# EAGLE board HUM-ASM-001-recover (EAGLE 9.5.1)
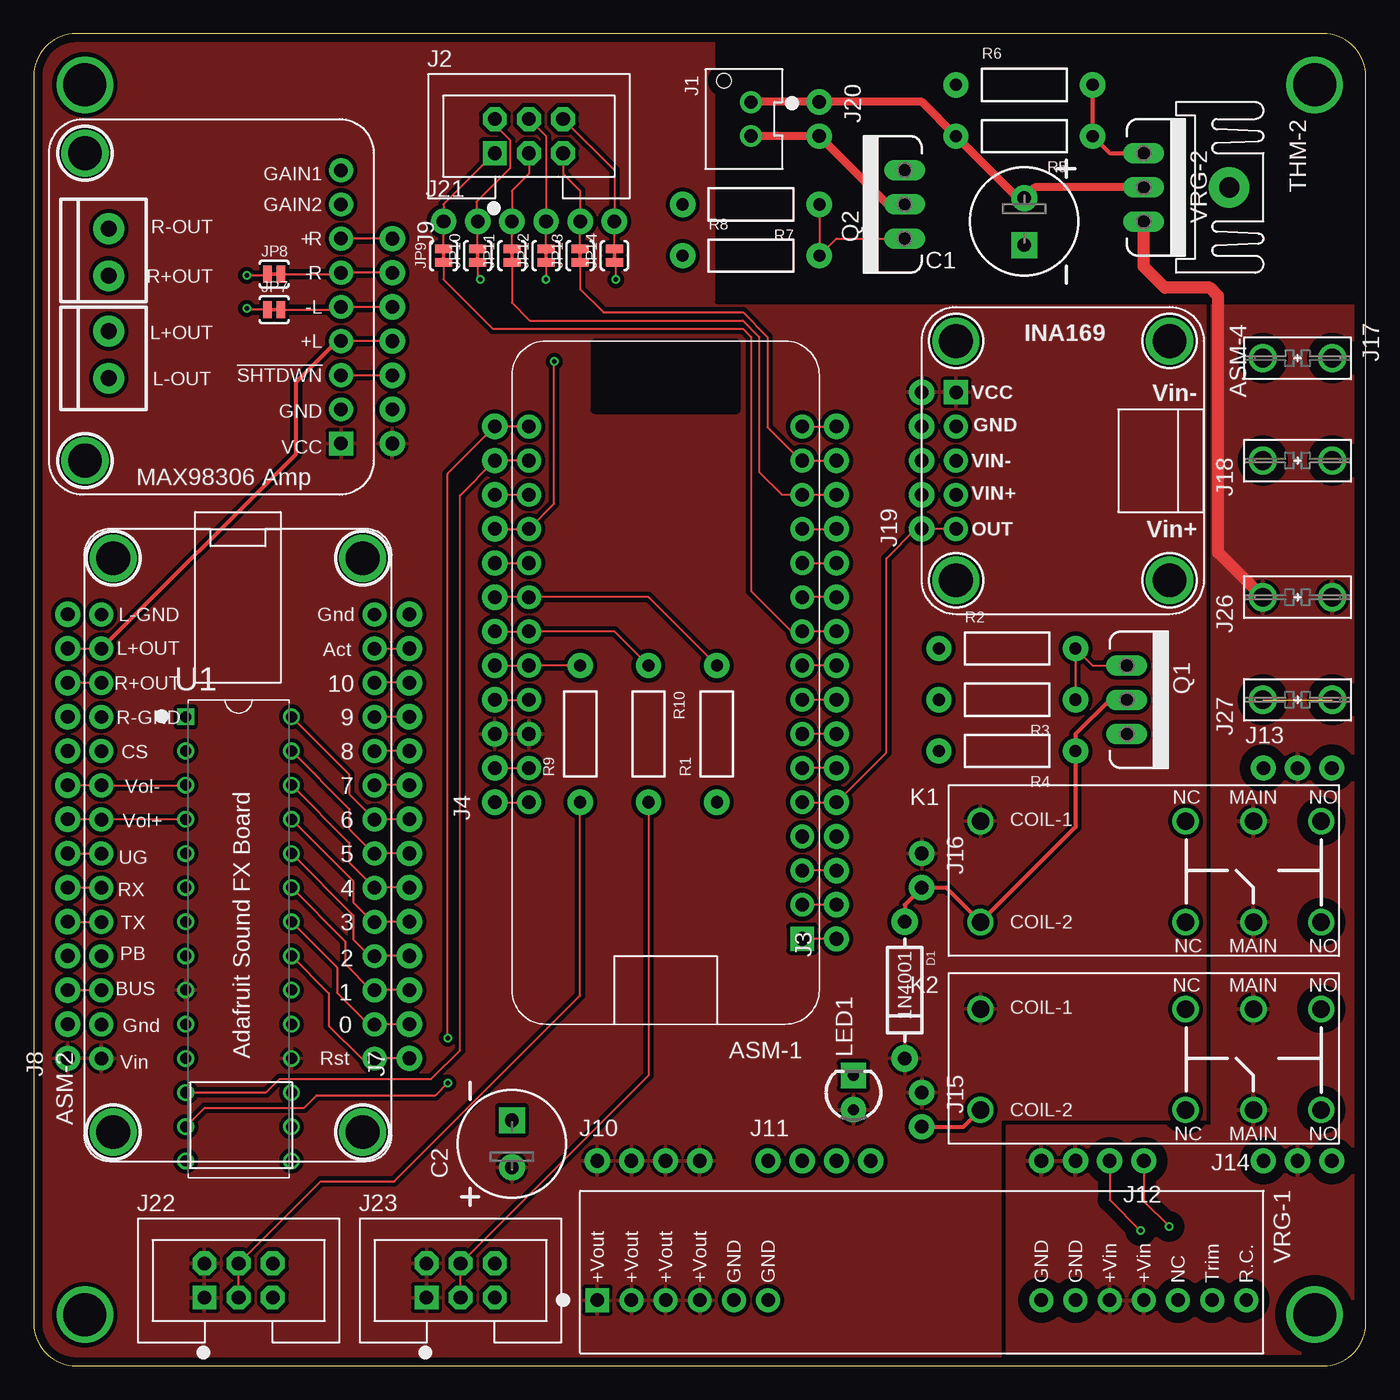
[diagram p0: board, top side]
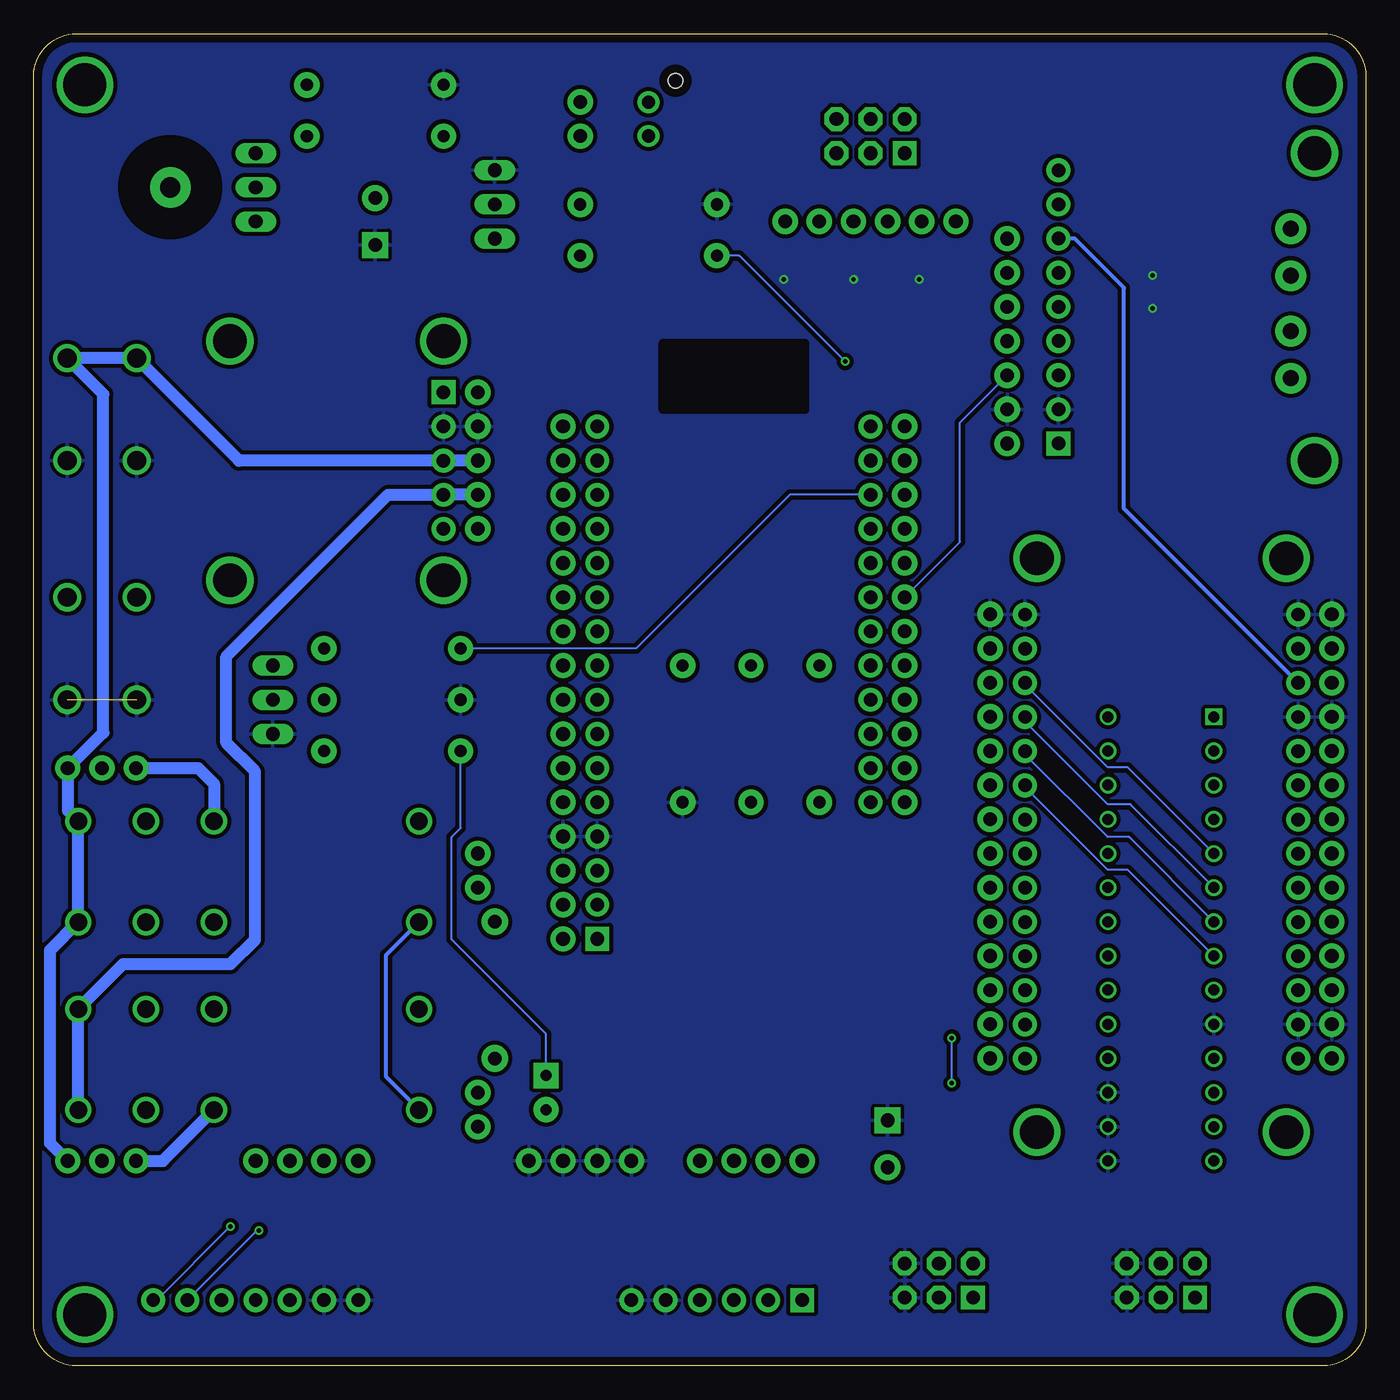
[diagram p1: board, bottom side, seen from below]

Size 99.06 x 99.06 mm. Coordinates in mm from the lower left corner, seen from the top.
Outline: 0,95.89 0,3.17 arc90 3.17,0 95.89,0 arc90 99.06,3.17 99.06,95.89 arc90 95.89,99.06 3.17,99.06 arc90 0,95.89
Copper layers (1*16): Top 0.035mm / dielectric 1.5mm / Bottom 0.035mm
Design rules "SeeedStudio_2layer_DRU_2017-06-08_MG": minimum track width 6mil, minimum drill 12mil, track to track 6mil, track to pad 6mil, pad to pad 6mil, via to via 6mil, smd to smd 0mil, copper to edge 25mil, drill to drill 10mil, minimum pad ring 6mil, minimum via ring 6mil, stop-mask expansion 2mil, vias tented up to drill 15mil, thermal gap 10mil

## Footprints (pad centres in the part's own frame; a part is rotated, then mirrored left to right if it is on the bottom)
ASM_ADAFRUIT_FEATHER_BLUEFRUIT = drill 1.016 pad 1.778: 3V3 -10.16,17.78; A0 -10.16,10.16; A1 -10.16,7.62; A2 -10.16,5.08; A3 -10.16,2.54; A4 -10.16,0; A5 -10.16,-2.54; AREF -10.16,15.24; D5 10.16,-12.7; D6 10.16,-10.16; D9 10.16,-7.62; D10 10.16,-5.08; D11 10.16,-2.54; D12 10.16,0; D13 10.16,2.54; DFU -10.16,-17.78; EN 10.16,7.62; GND@4 -10.16,12.7; MISO -10.16,-10.16; MOSI -10.16,-7.62; RX0 -10.16,-12.7; SCK -10.16,-5.08; SCL 10.16,-15.24; SDA 10.16,-17.78; TX1 -10.16,-15.24; USB/VBUS 10.16,5.08; VBAT 10.16,10.16 | drill 1.016 pad 1.778 square: !RESET -10.16,20.32
ASM_ADAFRUIT_SOUND_FX_BOARD = drill 1 pad 1.778: 1 -15.38,-9.73; 2 -12.84,-9.73; 3 -10.3,-9.73; 4 -7.76,-9.73; 5 -5.22,-9.73; 6 -2.68,-9.73; 7 -0.14,-9.73; 8 2.4,-9.73; 9 4.94,-9.73; 10 7.48,-9.73; 11 10.02,-9.73; 12 12.56,-9.73; 13 15.1,-9.73; 14 17.64,-9.73; 15 17.64,10.59; 16 15.1,10.59; 17 12.56,10.59; 18 10.02,10.59; 19 7.48,10.59; 20 4.94,10.59; 21 2.4,10.59; 22 -0.14,10.59; 23 -2.68,10.59; 24 -5.22,10.59; 25 -7.76,10.59; 26 -10.3,10.59; 27 -12.84,10.59; 28 -15.38,10.59 | drill 2.5 pad 3.2: 29 -20.841,-8.841; 30 -20.841,9.701; 31 21.831,9.701; 32 21.831,-8.841
ASM_ADAFRUIT_MAX98306_AMP_MOUNTING_HOLES = drill 1 pad 1.778 square: 1 -8.89,10.16 | drill 1 pad 1.778: 2 -8.89,7.62; 3 -8.89,5.08; 4 -8.89,2.54; 5 -8.89,0; 6 -8.89,-2.54; 7 -8.89,-5.08; 8 -8.89,-7.62; 9 -8.89,-10.16 | drill 2.5 pad 3.2: 10 10.16,11.43; 11 10.16,-11.43 | drill 1.194 pad 2.286: 12 8.382,5.309; 13 8.382,1.803; 14 8.382,-2.311; 15 8.382,-5.817
ASM_ADAFRUIT_INA169_MOUNTING_HOLES = drill 1 pad 1.778 square: 1 -5.08,-8.89 | drill 1 pad 1.778: 2 -2.54,-8.89; 3 0,-8.89; 4 2.54,-8.89; 5 5.08,-8.89 | drill 2.5 pad 3.2: P$1 -8.89,-8.89; P$2 -8.89,7; P$3 8.89,7; P$4 8.89,-8.89
CAP_E-035X080 = drill 1.016 pad 1.93: + -1.75,0 | drill 1.016 pad 1.93 square: - 1.75,0
DIODE-1N4001 = drill 1 pad 1.981: A -5.08,0; C 5.08,0
JST-2-PTH-VERT_XH = drill 1 pad 1.6: 1 -1.25,0; 2 1.25,0 | hole 1.1: -2.85,-2
2X3-SHROUDED = drill 1.016 pad 1.778 square: 1 -2.54,-1.27 | drill 1.016 pad 1.778 octagon: 2 -2.54,1.27; 3 0,-1.27; 4 0,1.27; 5 2.54,-1.27; 6 2.54,1.27
1X16_NO_SILK = drill 1.016 pad 1.88: 1 0,0; 2 2.54,0; 3 5.08,0; 4 7.62,0; 5 10.16,0; 6 12.7,0; 7 15.24,0; 8 17.78,0; 9 20.32,0; 10 22.86,0; 11 25.4,0; 12 27.94,0; 13 30.48,0; 14 33.02,0; 15 35.56,0; 16 38.1,0
1X12_NO_SILK = drill 1.016 pad 1.88: 1 0,0; 2 2.54,0; 3 5.08,0; 4 7.62,0; 5 10.16,0; 6 12.7,0; 7 15.24,0; 8 17.78,0; 9 20.32,0; 10 22.86,0; 11 25.4,0; 12 27.94,0
1X14_NO_SILK = drill 1.016 pad 1.88: 1 0,0; 2 2.54,0; 3 5.08,0; 4 7.62,0; 5 10.16,0; 6 12.7,0; 7 15.24,0; 8 17.78,0; 9 20.32,0; 10 22.86,0; 11 25.4,0; 12 27.94,0; 13 30.48,0; 14 33.02,0
1X07_NO_SILK = drill 1.016 pad 1.88: 1 0,0; 2 2.54,0; 3 5.08,0; 4 7.62,0; 5 10.16,0; 6 12.7,0; 7 15.24,0
1X04_NO_SILK_ALL_ROUND = drill 1.016 pad 1.88: 1 0,0; 2 2.54,0; 3 5.08,0; 4 7.62,0
1X03_NO_SILK = drill 1.016 pad 1.88: 1 0,0; 2 2.54,0; 3 5.08,0
1X02_NO_SILK = drill 1.016 pad 1.88: 1 0,0; 2 2.54,0
TE_1217861-1 = drill 1.4: 1 -2.578,0; 2 2.578,0
1X05_NO_SILK = drill 1.016 pad 1.88: 1 0,0; 2 2.54,0; 3 5.08,0; 4 7.62,0; 5 10.16,0
1X06_NO_SILK = drill 1.016 pad 1.88: 1 0,0; 2 2.54,0; 3 5.08,0; 4 7.62,0; 5 10.16,0; 6 12.7,0
PAD-JUMPER-2-NC_BY_TRACE_YES_SILK = smd 0.635 x 1.27: 1 -0.508,0; 2 0.508,0
RELAY_TE_7-1393239-7 = drill 1.3: COIL-1 -12.15,3.67; COIL-2 -12.15,-3.83; MAIN-1 8.15,3.67; MAIN-2 8.15,-3.83; NC-1 3.11,3.67; NC-2 3.11,-3.83; NO-1 13.19,3.67; NO-2 13.19,-3.83
LED3MM = drill 0.813 pad 1.88: A -1.27,0 | drill 0.813 pad 1.88 square: K 1.27,0
TOOLING_HOLE_0.125_IN_HORSESHOE = drill 3.2: P$1 0,0
TO-220-VERTICAL = drill 1.016 long: P1 -2.54,0; P2 0,0; P3 2.54,0
AXIAL-0.4 = drill 0.9 pad 1.88: P$1 -5.08,0; P$2 5.08,0
SK95-2M3 = drill 1.5 pad 3: P$1 0,2.54
DIP787W45P254L3556H508Q28 = drill 0.82 pad 1.23 square: 1 -3.935,16.51 | drill 0.82 pad 1.23: 2 -3.935,13.97; 3 -3.935,11.43; 4 -3.935,8.89; 5 -3.935,6.35; 6 -3.935,3.81; 7 -3.935,1.27; 8 -3.935,-1.27; 9 -3.935,-3.81; 10 -3.935,-6.35; 11 -3.935,-8.89; 12 -3.935,-11.43; 13 -3.935,-13.97; 14 -3.935,-16.51; 15 3.935,-16.51; 16 3.935,-13.97; 17 3.935,-11.43; 18 3.935,-8.89; 19 3.935,-6.35; 20 3.935,-3.81; 21 3.935,-1.27; 22 3.935,1.27; 23 3.935,3.81; 24 3.935,6.35; 25 3.935,8.89; 26 3.935,11.43; 27 3.935,13.97; 28 3.935,16.51
VRG_NID100-X = drill 1 pad 1.778 square: P$1 -24.13,-2 | drill 1 pad 1.778: P$2 -21.59,-2; P$3 -19.05,-2; P$4 -16.51,-2; P$5 -13.97,-2; P$6 -11.43,-2; P$7 8.89,-2; P$8 11.43,-2; P$9 13.97,-2; P$10 16.51,-2; P$11 19.05,-2; P$12 21.59,-2; P$13 24.13,-2

## Placement (x,y rotation side)
ASM-1  Feather Bluefruit 32u4  [ASM_ADAFRUIT_FEATHER_BLUEFRUIT]  46.99,52.07 180 top
ASM-2  [ASM_ADAFRUIT_SOUND_FX_BOARD]  15.62,38.23 90 top
ASM-3  [ASM_ADAFRUIT_MAX98306_AMP_MOUNTING_HOLES]  13.97,78.74 180 top
ASM-4  [ASM_ADAFRUIT_INA169_MOUNTING_HOLES]  77.47,67.31 270 top
C1  100uF, 50V  [CAP_E-035X080]  73.66,85.09 270 top
C2  100uF, 50V  [CAP_E-035X080]  35.56,16.51 90 top
D1  1N4001  [DIODE-1N4001]  64.77,27.94 270 top
J1  B2B-XH-AM(LF)(SN)  [JST-2-PTH-VERT_XH]  53.34,92.71 270 top
J2  75869-131LF  [2X3-SHROUDED]  36.83,91.44 0 top
J3  [1X16_NO_SILK]  59.69,31.75 90 top
J4  [1X12_NO_SILK]  34.29,41.91 90 top
J7  [1X14_NO_SILK]  27.94,22.86 90 top
J8  [1X14_NO_SILK]  2.54,22.86 90 top
J9  [1X07_NO_SILK]  26.67,83.82 270 top
J10  [1X04_NO_SILK_ALL_ROUND]  41.91,15.24 0 top
J11  [1X04_NO_SILK_ALL_ROUND]  54.61,15.24 0 top
J12  [1X04_NO_SILK_ALL_ROUND]  82.55,15.24 180 top
J13  [1X03_NO_SILK]  91.44,44.45 0 top
J14  [1X03_NO_SILK]  91.44,15.24 0 top
J15  [1X02_NO_SILK]  66.04,20.32 270 top
J16  [1X02_NO_SILK]  66.04,38.1 270 top
J17  [TE_1217861-1]  93.98,74.93 180 top
J18  [TE_1217861-1]  93.98,67.31 0 top
J19  [1X05_NO_SILK]  66.04,62.23 90 top
J20  [1X02_NO_SILK]  58.42,93.98 270 top
J21  [1X06_NO_SILK]  30.48,85.09 0 top
J22  75869-131LF  [2X3-SHROUDED]  15.24,6.35 0 top
J23  75869-131LF  [2X3-SHROUDED]  31.75,6.35 0 top
J26  [TE_1217861-1]  93.98,57.15 0 top
J27  [TE_1217861-1]  93.98,49.53 0 top
JP7  CON_JUMPER_PAD-2-NC_BY_TRACE  [PAD-JUMPER-2-NC_BY_TRACE_YES_SILK]  17.88,78.54 0 top
JP8  CON_JUMPER_PAD-2-NC_BY_TRACE  [PAD-JUMPER-2-NC_BY_TRACE_YES_SILK]  17.88,81.18 0 top
JP9  CON_JUMPER_PAD-2-NC_BY_TRACE  [PAD-JUMPER-2-NC_BY_TRACE_YES_SILK]  30.48,82.55 90 top
JP10  CON_JUMPER_PAD-2-NC_BY_TRACE  [PAD-JUMPER-2-NC_BY_TRACE_YES_SILK]  33.02,82.55 90 top
JP11  CON_JUMPER_PAD-2-NC_BY_TRACE  [PAD-JUMPER-2-NC_BY_TRACE_YES_SILK]  35.56,82.55 90 top
JP12  CON_JUMPER_PAD-2-NC_BY_TRACE  [PAD-JUMPER-2-NC_BY_TRACE_YES_SILK]  38.1,82.55 90 top
JP13  CON_JUMPER_PAD-2-NC_BY_TRACE  [PAD-JUMPER-2-NC_BY_TRACE_YES_SILK]  40.64,82.55 90 top
JP14  CON_JUMPER_PAD-2-NC_BY_TRACE  [PAD-JUMPER-2-NC_BY_TRACE_YES_SILK]  43.18,82.55 90 top
K1  7-1393239-7  [RELAY_TE_7-1393239-7]  82.55,36.83 0 top
K2  7-1393239-7  [RELAY_TE_7-1393239-7]  82.55,22.86 0 top
LED1  3mm Green  [LED3MM]  60.96,20.32 90 top
MH1  [TOOLING_HOLE_0.125_IN_HORSESHOE]  3.81,3.81 0 top
MH2  [TOOLING_HOLE_0.125_IN_HORSESHOE]  3.81,95.25 0 top
MH3  [TOOLING_HOLE_0.125_IN_HORSESHOE]  95.25,95.25 0 top
MH4  [TOOLING_HOLE_0.125_IN_HORSESHOE]  95.25,3.81 0 top
Q1  IRLB8721PBF  [TO-220-VERTICAL]  81.28,49.53 270 top
Q2  IRLB8721PBF  [TO-220-VERTICAL]  64.77,86.36 90 top
R1  1k  [AXIAL-0.4]  50.8,46.99 90 top
R2  100  [AXIAL-0.4]  72.39,53.34 0 top
R3  10k  [AXIAL-0.4]  72.39,49.53 180 top
R4  100  [AXIAL-0.4]  72.39,45.72 180 top
R5  220  [AXIAL-0.4]  73.66,91.44 180 top
R6  4k, 1%  [AXIAL-0.4]  73.66,95.25 0 top
R7  10k  [AXIAL-0.4]  53.34,86.36 180 top
R8  100  [AXIAL-0.4]  53.34,82.55 0 top
R9  100  [AXIAL-0.4]  40.64,46.99 90 top
R10  100  [AXIAL-0.4]  45.72,46.99 270 top
THM-2  V5629W220  [SK95-2M3]  86.36,87.63 270 top
U1  MCP23017-E/SP  [DIP787W45P254L3556H508Q28]  15.24,31.75 0 top
VRG-1  NID100-5  [VRG_NID100-X]  66.04,6.89 0 top
VRG-2  LM317  [TO-220-VERTICAL]  82.55,87.63 270 top

## Library data of the parts
ASM-1-ASM-4 C1 C2 D1 J1 J3 J4 J7-J9 J13-J20 J26 J27 JP7-JP14 K1 K2 MH1-MH4 R1-R10 THM-2 VRG-1 VRG-2 = MG-Eagle_v1
J2 J22 J23 = MG-Eagle_v1; PROD_ID: CONN-10681
J10-J12 = MG-Eagle_v1; PROD_ID: CONN-09696
J21 = MG-Eagle_v1; PROD_ID: CONN-08437
LED1 = MG-Eagle_v1; PROD_ID: DIO-08794
Q1 Q2 = MG-Eagle_v1; PROD_ID: TRANS-10060
U1 = MG-Eagle_v1; DESCRIPTION: MCP23017 Series 5.5 V 1.7 MHz SMT 16-Bit I2C I/O Expander - SPDIP-28; DIGI-KEY_PART_NUMBER: MCP23017-E/SP-ND; DIGI-KEY_PURCHASE_URL: https://www.digikey.com/product-detail/en/microchip-technology/MCP23017-E-SP/MCP23017-E-SP-ND/894272?utm_source=snapeda&utm_medium=aggregator&utm_campaign=symbol; MF: Microchip; MP: MCP23017-E/SP; PACKAGE: DIP-28 Microchip

## Nets
3V: ASM-1.3V3 J3.2
5V: ASM-1.USB/VBUS ASM-2.28 ASM-3.1 ASM-4.1 C2.+ D1.C J4.3 J8.1 J9.7 J10.1 J10.2 J10.3 J10.4 J15.1 J16.1 J19.5 J22.1 J22.2 J23.1 J23.2 K1.COIL-1 K2.COIL-1 LED1.A U1.9 U1.18 VRG-1.P$1 VRG-1.P$2 VRG-1.P$3 VRG-1.P$4
24V: C1.+ J1.1 J20.1 R5.P$2 VRG-2.P2
48V: J12.3 J12.4 J13.2 J14.2 J26.1 J26.2 K1.MAIN-1 K1.MAIN-2 K2.MAIN-1 K2.MAIN-2 VRG-1.P$9 VRG-1.P$10 VRG-2.P3
!AMP-SHDN: ASM-1.D10 ASM-3.3 J4.7 J9.5 R1.P$2
ADJ: R5.P$1 R6.P$2 VRG-2.P1
CRNT-MON: ASM-1.A0 ASM-4.5 J3.5 J19.1
DFU: ASM-1.DFU J3.16
ENCODER-A: ASM-1.RX0 J3.14 JP11.1
ENCODER-B: ASM-1.TX1 J3.15 JP13.1
ENCODER-SW: ASM-1.A5 J3.10 JP9.1
FAN-CTRL: ASM-1.D6 J4.9 R8.P$1
GND: ASM-1.GND@4 ASM-2.14 ASM-2.15 ASM-2.18 ASM-2.27 ASM-3.2 ASM-4.2 C1.- C2.- J3.4 J7.14 J8.2 J8.11 J8.14 J9.6 J11.1 J11.2 J11.3 J11.4 J18.1 J18.2 J19.4 J22.5 J22.6 J23.5 J23.6 J27.1 J27.2 JP7.1 JP8.1 JP10.1 JP12.1 JP14.1 Q1.P3 Q2.P3 R1.P$1 R3.P$2 R6.P$1 R7.P$2 U1.10 U1.15 U1.16 U1.17 VRG-1.P$5 VRG-1.P$6 VRG-1.P$7 VRG-1.P$8
I2C-SCL: ASM-1.SCL J4.11 U1.12
I2C-SDA: ASM-1.SDA J4.12 U1.13
K1-NC: J13.1 K1.NC-1
K2-NC: J14.1 K2.NC-2
LED1-DATA: ASM-1.D12 J4.5 R9.P$2
LED2-DATA: ASM-1.D11 J4.6 R10.P$1
MIST-CTRL: ASM-1.D5 J4.10 R2.P$1
MIST-VIN: ASM-4.3 J13.3 J14.3 J17.1 J17.2 J19.3 K1.NO-1 K1.NO-2
N$1: ASM-1.!RESET J3.1
N$2: ASM-1.AREF J3.3
N$3: U1.1
N$4: U1.2
N$5: ASM-1.A1 J3.6
N$6: ASM-1.A2 J3.7
N$7: ASM-1.A3 J3.8
N$8: ASM-1.A4 J3.9
N$9: J22.3 J22.4 R9.P$1
N$10: D1.A J15.2 J16.2 K1.COIL-2 K2.COIL-2 Q1.P2 R4.P$1
N$11: Q1.P1 R2.P$2 R3.P$1
N$12: J1.2 J20.2 Q2.P2
N$13: LED1.K R4.P$2
N$14: ASM-3.5 J9.3 JP7.2
N$15: ASM-3.6 J9.2 JP8.2
N$16: ASM-4.4 J19.2 K2.NO-1 K2.NO-2
N$17: Q2.P1 R7.P$1 R8.P$2
N$18: J2.1 J21.1 JP9.2
N$20: ASM-1.D9 J4.8
N$21: J2.2 J21.2 JP10.2
N$22: J2.3 J21.3 JP11.2
N$24: ASM-1.D13 J4.4
N$25: ASM-1.EN J4.2
N$26: ASM-2.13 J7.13
N$27: J12.1 VRG-1.P$13
N$29: J12.2 VRG-1.P$12
N$30: ASM-2.24 J8.5
N$31: ASM-2.23 J8.6
N$38: ASM-2.22 J8.7
N$39: J2.4 J21.4 JP12.2
N$40: J2.5 J21.5 JP13.2
N$41: J2.6 J21.6 JP14.2
N$42: J23.3 J23.4 R10.P$2
SFX-0: ASM-2.2 J7.2 U1.22
SFX-1: ASM-2.3 J7.3 U1.23
SFX-2: ASM-2.4 J7.4 U1.24
SFX-3: ASM-2.5 J7.5 U1.25
SFX-4: ASM-2.6 J7.6 U1.26
SFX-5: ASM-2.7 J7.7 U1.27
SFX-6: ASM-2.8 J7.8 U1.28
SFX-7: ASM-2.9 J7.9 U1.8
SFX-8: ASM-2.10 J7.10 U1.7
SFX-9: ASM-2.11 J7.11 U1.6
SFX-10: ASM-2.12 J7.12 U1.5
SFX-LOUT: ASM-2.16 ASM-3.4 J8.13 J9.4
SFX-ROUT: ASM-2.17 ASM-3.7 J8.12 J9.1
SFX-RST: ASM-2.1 J7.1 U1.21
SFX-VOL-N: ASM-2.20 J8.9 U1.3
SFX-VOL-P: ASM-2.21 J8.8 U1.4
SPI-MISO: ASM-1.MISO J3.13
SPI-MOSI: ASM-1.MOSI J3.12
SPI-SCK: ASM-1.SCK J3.11
USB/VBUS: ASM-2.26 J8.3
VBAT: ASM-1.VBAT J4.1

## Tracks (layer width: path | path; a pad name or v marks a point on that pad's centre or on a via)
3V
  Top 0.152: J3.2 ASM-1.3V3
5V
  pour Top (isolate 0.305, rank 2): -3.81,100.33 -3.81,-3.81 102.87,-3.81 102.87,100.33
24V
  Top 0.61: J1.1 53.36,93.98 J20.1 66.04,93.98 R5.P$2 73.18,86.84 C1.+ 74.45,87.63 VRG-2.P2
24V-CUTOUT
  cutout Top (isolate 0.305, rank 2): 50.8,100.33 50.8,79.1 101.6,79.1 101.6,100.33
48V
  Top 0.889: J26.1 88.09,60.47 88.09,79.55 87.48,80.16 84.12,80.16 82.55,81.74 VRG-2.P3
  pour Top (isolate 0.813): 100.33,80.16 87.63,80.16 87.63,17.78 72.39,17.78 72.39,-1.27 100.33,-1.27
!AMP-SHDN
  Top 0.152: J4.7 ASM-1.D10 45.72,57.15 R1.P$2 | ASM-3.3 J9.5
  Bottom 0.152: J4.7 30.18,61.27 30.18,70.16 J9.5
ADJ
  Top 0.305: R6.P$2 R5.P$1 80.01,90.17 VRG-2.P1
CRNT-MON
  Top 0.152: ASM-4.5 66.14,62.23 J19.1 65.58,62.23 63.4,60.05 63.4,45.62 J3.5 ASM-1.A0
DFU
  Top 0.152: ASM-1.DFU J3.16
ENCODER-A
  Top 0.152: J3.14 ASM-1.RX0 55.63,64.77 53.95,66.45 53.95,76.5 52.73,77.72 36.88,77.72 35.56,79.05 JP11.1
ENCODER-B
  Top 0.152: J3.15 ASM-1.TX1 57.05,67.31 54.56,69.8 54.56,76.5 52.73,78.33 42.37,78.33 40.64,80.06 JP13.1
ENCODER-SW
  Top 0.152: J3.10 57.3,54.61 ASM-1.A5 56.34,54.61 53.34,57.61 53.34,76.5 52.73,77.11 34.14,77.11 30.48,80.77 JP9.1
FAN-CTRL  (via drill 0.33)
  Top 0.152: J4.9 ASM-1.D6 38.71,64.11 v38.71,74.68
  Bottom 0.152: v38.71,74.68 46.58,82.55 R8.P$1
GND  (via drill 0.33)  (1 unrouted)
  Top 0.152: JP10.1 33.02,80.97 v33.22,80.77 | JP12.1 v38.1,80.77 | JP14.1 43.28,81.94 v43.28,80.77 | JP8.1 17.27,81.08 v15.85,81.08 | JP7.1 15.95,78.54 v15.85,78.64
  pour Bottom (isolate 0.305): -1.27,99.06 -1.27,-1.27 100.33,-1.27 100.33,100.33 -1.27,100.33
I2C-SCL
  Top 0.152: ASM-1.SCL J4.11 31.7,64.72 31.7,23.47 29.57,21.34 18.29,21.34 17.27,20.32 U1.12
I2C-SDA  (via drill 0.33)
  Top 0.152: ASM-1.SDA J4.12 30.79,66.34 v30.79,24.38 | U1.13 12.73,19.2 20.12,19.2 21.03,20.12 29.87,20.12 v30.79,21.03
  Bottom 0.152: v30.79,21.03 v30.79,24.38
K1-NC
  Bottom 0.889: J13.1 86.82,44.45 85.65,43.28 85.65,40.51 K1.NC-1
K2-NC
  Bottom 0.889: J14.1 89.45,15.24 K2.NC-2
LED1-DATA
  Top 0.152: J4.5 ASM-1.D12 R9.P$2
LED2-DATA
  Top 0.152: J4.6 ASM-1.D11 43.18,54.61 R10.P$1
MIST-CTRL
  Top 0.152: J4.10 ASM-1.D5
  Bottom 0.152: ASM-1.D5 42.82,64.77 54.25,53.34 R2.P$1
MIST-VIN
  Bottom 0.889: J19.3 ASM-4.3 83.78,67.31 J17.2 J17.1 93.88,72.25 93.88,47.09 J13.3 96.52,41.28 K1.NO-1 K1.NO-2 97.84,30.9 97.84,16.56 J14.3
N$1
  Top 0.152: J3.1 ASM-1.!RESET
N$2
  Top 0.152: J3.3 ASM-1.AREF
N$5
  Top 0.152: J3.6 ASM-1.A1
N$6
  Top 0.152: J3.7 ASM-1.A2
N$7
  Top 0.152: J3.8 ASM-1.A3
N$8
  Top 0.152: J3.9 ASM-1.A4
N$9
  Top 0.152: J22.3 J22.4 21.34,13.72 26.82,13.72 40.64,27.53 R9.P$1
N$10
  Top 0.305: J15.2 69.15,17.78 K2.COIL-2 | D1.A 64.77,34.29 J16.2 67.84,35.56 K1.COIL-2 77.47,40.07 R4.P$1 77.47,46.99 80.01,49.53 Q1.P2
  Bottom 0.305: K2.COIL-2 72.85,21.48 72.85,30.55 K1.COIL-2
N$11
  Top 0.152: R3.P$1 R2.P$2 78.74,52.07 Q1.P1
N$12
  Top 0.61: J1.2 58.4,91.46 J20.2 63.5,86.36 Q2.P2
N$13
  Bottom 0.152: LED1.K 60.96,24.69 67.97,31.7 67.97,39.32 67.31,39.98 R4.P$2
N$14
  Top 0.152: J9.3 ASM-3.5 22.66,78.54 JP7.2
N$15
  Top 0.152: J9.2 ASM-3.6 22.76,81.18 JP8.2
N$16
  Bottom 0.889: J19.2 ASM-4.4 72.69,64.77 84.73,52.73 84.73,46.33 82.6,44.2 82.6,31.7 84.43,29.87 92.4,29.87 K2.NO-1 K2.NO-2
N$17
  Top 0.152: R7.P$1 R8.P$2 59.69,83.82 Q2.P1
N$18
  Top 0.152: J2.1 30.48,86.36 J21.1 JP9.2
N$20
  Top 0.152: J4.8 ASM-1.D9
N$21
  Top 0.152: J2.2 34.29,92.27 35.41,91.15 35.41,89.05 32.92,86.56 32.92,85.19 J21.2 JP10.2
N$22
  Top 0.152: J2.3 36.83,88.65 35.56,87.38 J21.3 JP11.2
N$24
  Top 0.152: J4.4 ASM-1.D13
N$25
  Top 0.152: J4.2 ASM-1.EN
N$26
  Top 0.152: ASM-2.13 25.36,53.34 J7.13
N$27  (via drill 0.33)
  Top 0.152: J12.1 82.55,12.24 v84.43,10.36
  Bottom 0.152: v84.43,10.36 89.9,4.89 VRG-1.P$13
N$29  (via drill 0.33)
  Top 0.152: J12.2 80.01,12.34 v82.3,10.06
  Bottom 0.152: v82.3,10.06 82.46,10.06 VRG-1.P$12
N$30
  Top 0.152: J8.5 5.02,33.02 ASM-2.24
N$31
  Top 0.152: J8.6 5.02,35.56 ASM-2.23
N$38
  Top 0.152: J8.7 5.02,38.1 ASM-2.22
N$39
  Top 0.152: J2.4 38.1,91.44 J21.4 JP12.2
N$40
  Top 0.152: J2.5 39.37,88.65 40.64,87.38 J21.5 JP13.2
N$41
  Top 0.152: J2.6 43.18,88.9 J21.6 JP14.2
N$42
  Top 0.152: J23.3 J23.4 45.72,21.59 R10.P$2
SFX-0
  Top 0.152: J7.2 27.93,25.39 ASM-2.2 24.91,25.39 22.55,27.74 22.55,29.64 U1.22
SFX-1
  Top 0.152: J7.3 25.36,27.94 ASM-2.3 25.11,27.93 23.16,29.87 23.16,31.57 U1.23
SFX-2
  Top 0.152: J7.4 25.6,30.48 25.36,30.48 | 25.36,30.48 ASM-2.4 | U1.24 23.77,33.5 23.77,31.7 24.99,30.48 25.36,30.48
SFX-3
  Top 0.152: J7.5 25.36,33.02 | 25.36,33.02 ASM-2.5 | U1.25 23.77,36.04 23.77,34.44 25.2,33.02 25.36,33.02
SFX-4
  Top 0.152: J7.6 25.36,35.56 ASM-2.6 23.47,37.43 23.47,38.88 U1.26
SFX-5
  Top 0.152: J7.7 25.6,38.1 25.36,38.1 | 25.36,38.1 ASM-2.7 | U1.27 23.47,41.42 23.47,39.93 25.3,38.1 25.36,38.1
SFX-6
  Top 0.152: J7.8 25.36,40.64 | 25.36,40.64 ASM-2.8 | U1.28 23.47,43.97 23.47,42.53 25.36,40.64
SFX-7
  Top 0.152: J7.9 25.36,43.18 ASM-2.9
  Bottom 0.152: U1.8 17.71,36.88 19.2,36.88 25.35,43.03 ASM-2.9
SFX-8
  Top 0.152: J7.10 25.36,45.72 ASM-2.10
  Bottom 0.152: U1.7 17.6,39.32 19.2,39.32 25.35,45.47 ASM-2.10
SFX-9
  Top 0.152: J7.11 25.36,48.26 ASM-2.11
  Bottom 0.152: U1.6 17.5,41.76 19.2,41.76 25.35,47.91 ASM-2.11
SFX-10
  Top 0.152: J7.12 25.36,50.8 ASM-2.12
  Bottom 0.152: U1.5 17.71,44.5 19.2,44.5 25.35,50.65 ASM-2.12
SFX-LOUT
  Top 0.152: J9.4 ASM-3.4 | J8.13 5.02,53.34 ASM-2.16
  Top 0.305: ASM-2.16 19.51,67.8 19.51,73.15 22.55,76.2 ASM-3.4
SFX-ROUT
  Top 0.152: J9.1 ASM-3.7 22.25,83.82 | J8.12 5.02,50.8 ASM-2.17
  Bottom 0.305: ASM-2.17 17.98,63.74 17.98,80.16 21.64,83.82 ASM-3.7
SFX-RST
  Top 0.152: J7.1 27.93,22.85 25.6,22.85 ASM-2.1 24.4,22.85 21.95,25.3 21.95,27.71 U1.21
SFX-VOL-N
  Top 0.152: J8.9 2.55,43.17 ASM-2.20 11.29,43.17 U1.3
SFX-VOL-P
  Top 0.152: ASM-2.21 4.88,40.63 | 4.88,40.63 2.55,40.63 J8.8 | U1.4 4.89,40.64 4.88,40.63
SPI-MISO
  Top 0.152: ASM-1.MISO J3.13
SPI-MOSI
  Top 0.152: ASM-1.MOSI J3.12
SPI-SCK
  Top 0.152: J3.11 ASM-1.SCK
USB/VBUS
  Top 0.152: J8.3 5.02,27.94 ASM-2.26
VBAT
  Top 0.152: J4.1 ASM-1.VBAT